# EAGLE board MyoWare_LED_Shield-Panel-v10 (EAGLE 7.5.0), part 1 of 2
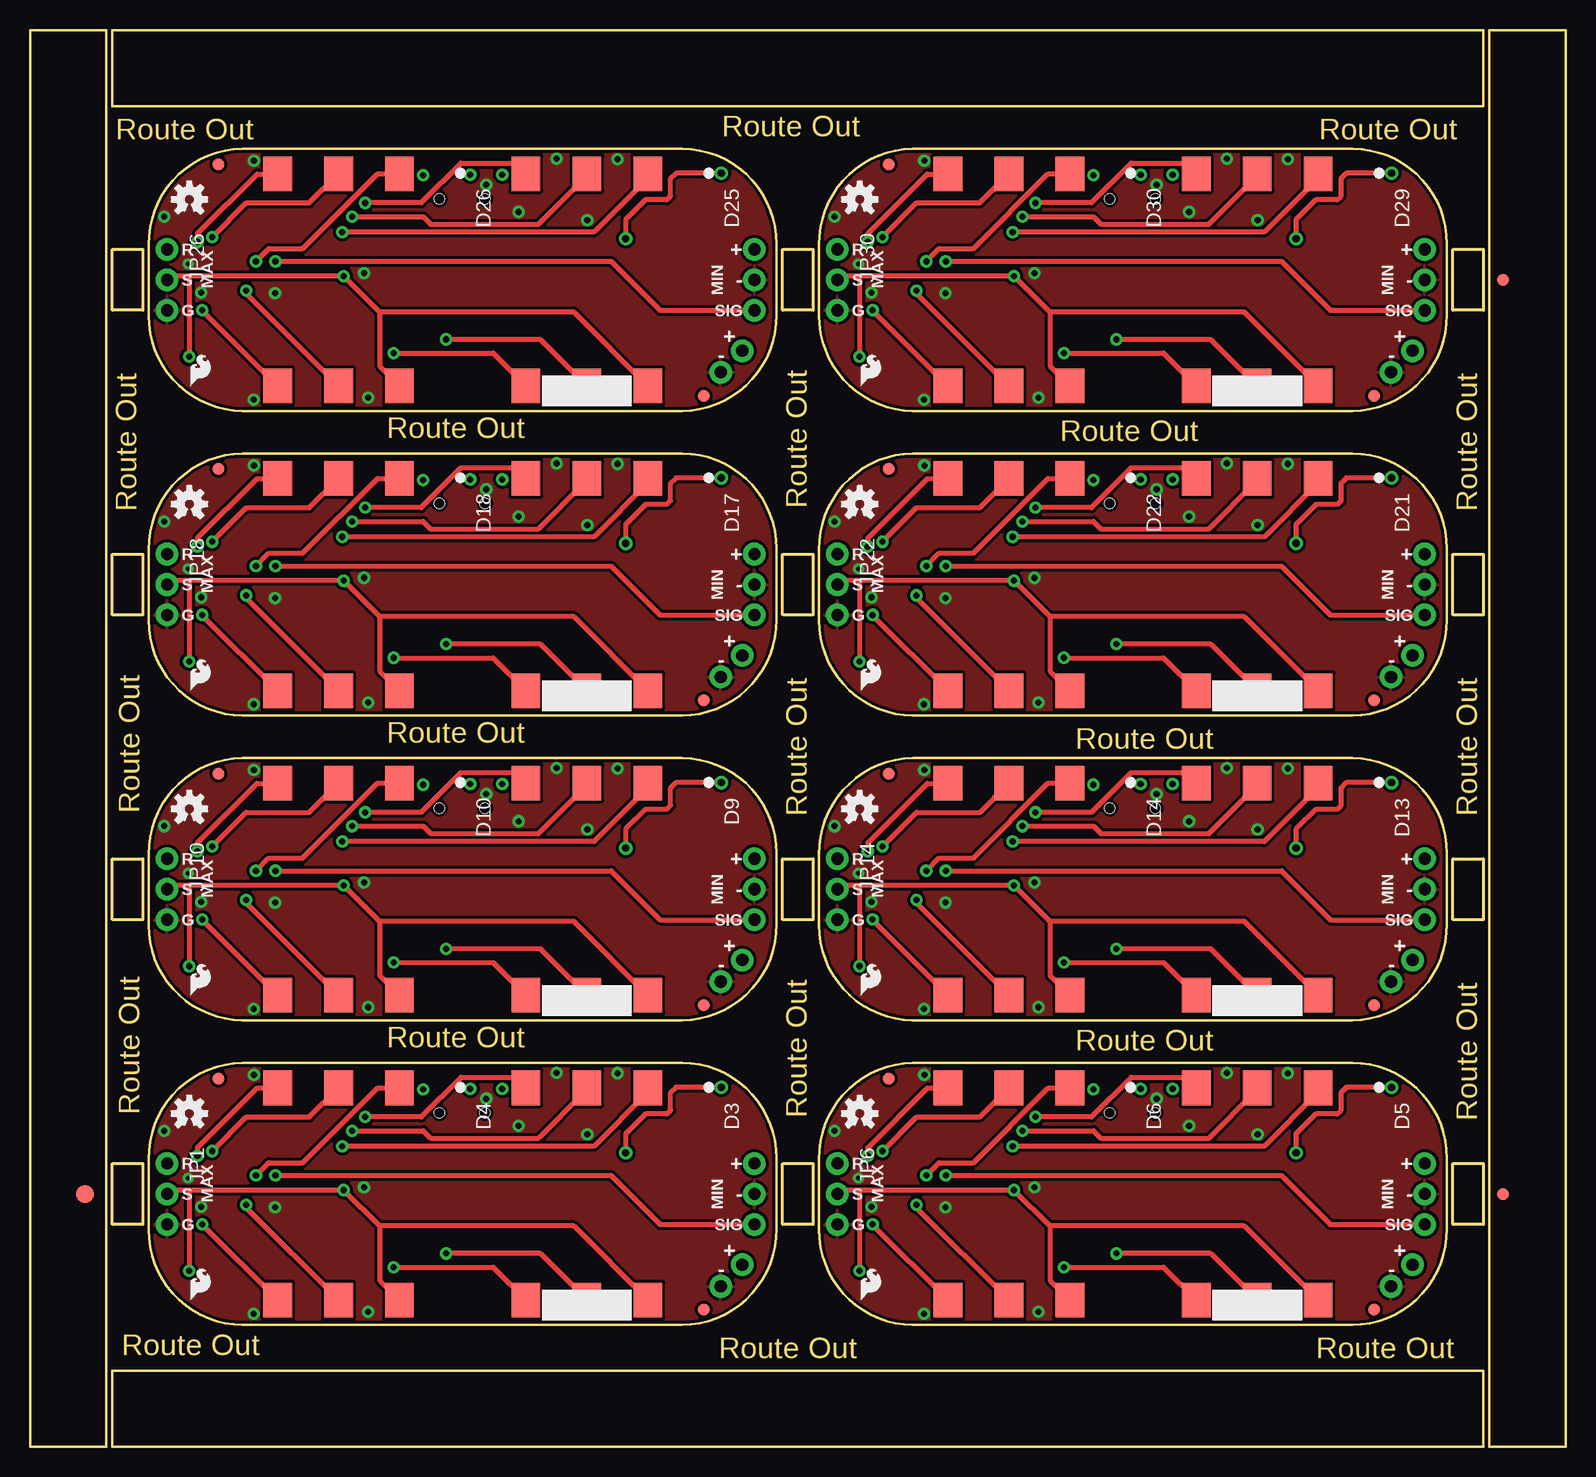
[diagram p0: board, top side]
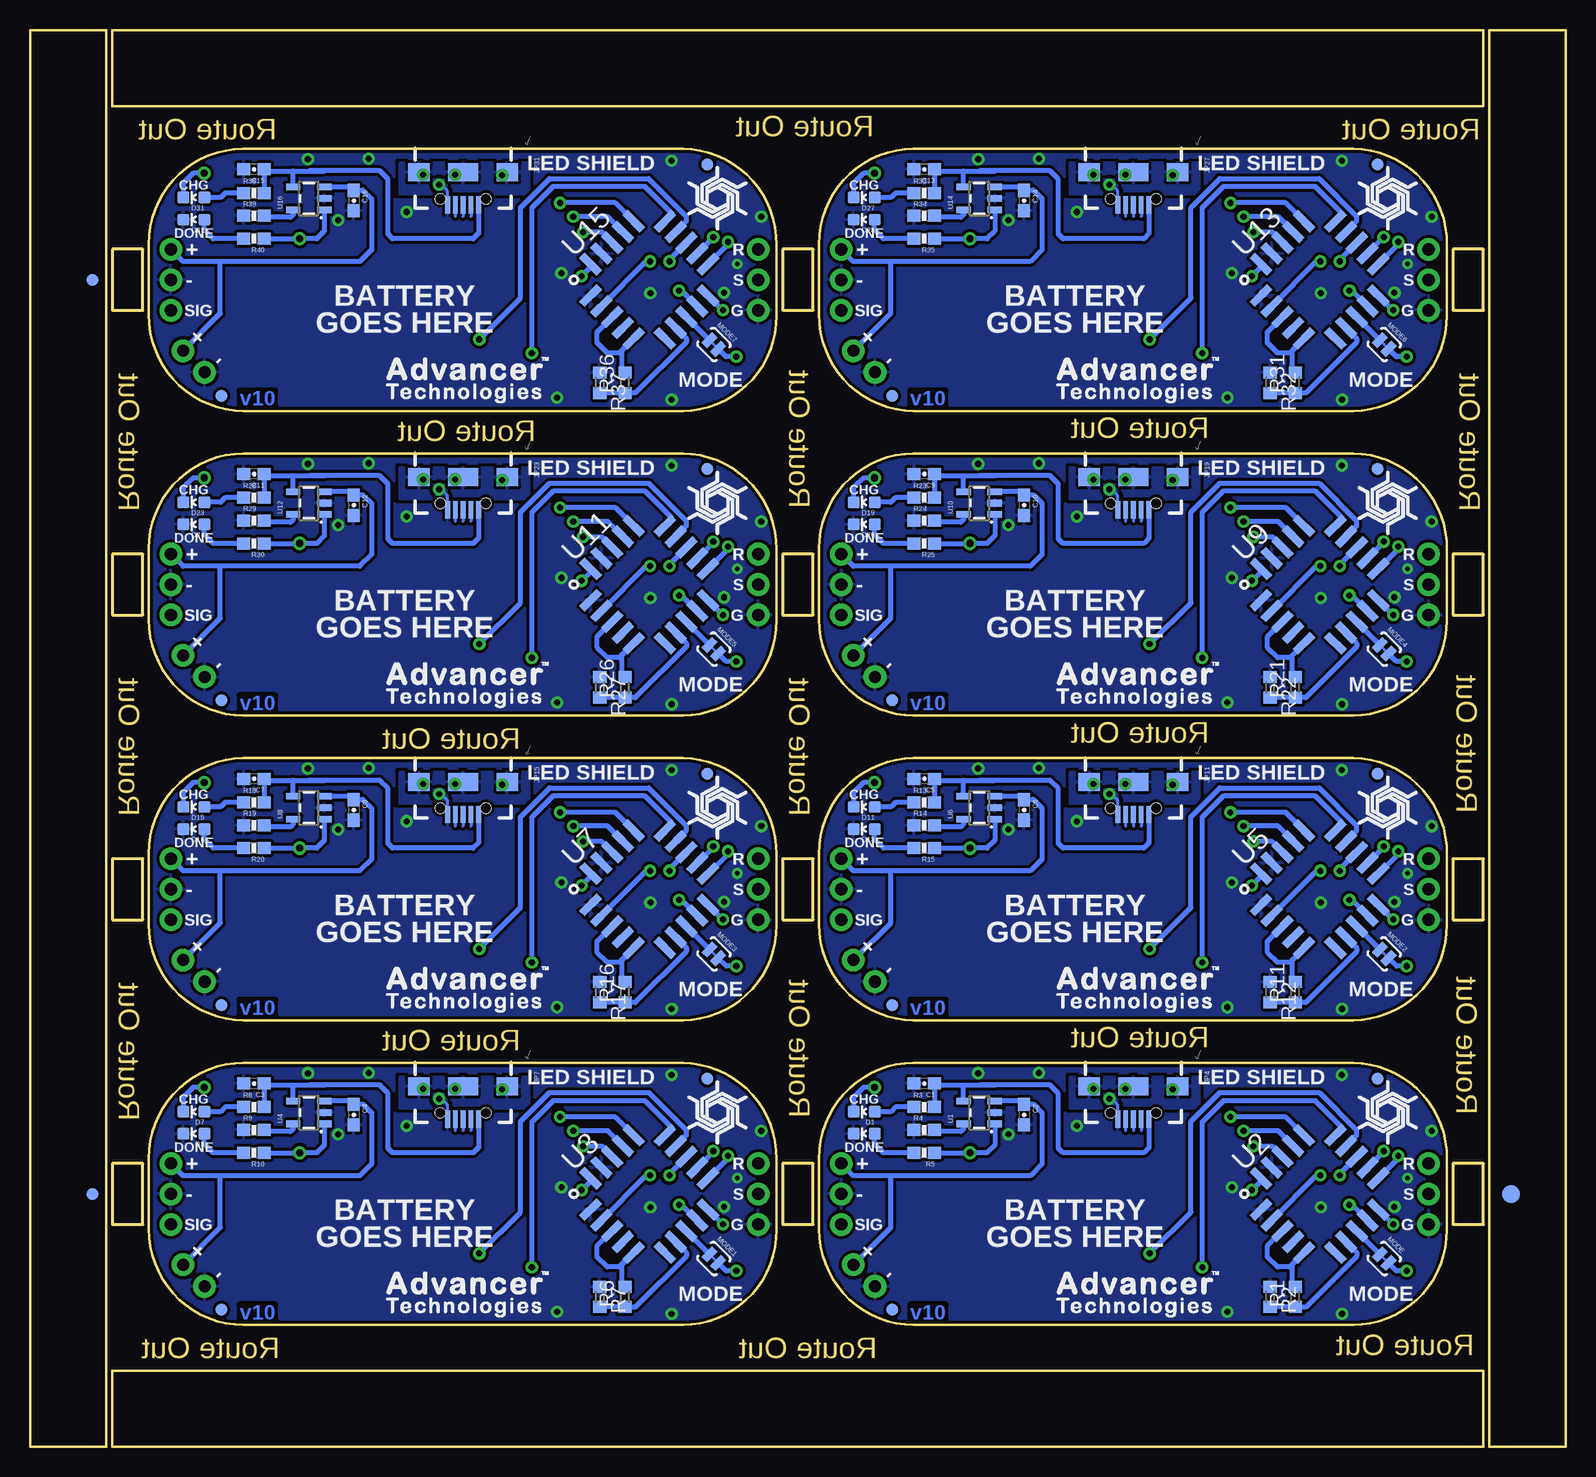
[diagram p1: board, bottom side, seen from below]

Size 128.02 x 118.11 mm. Coordinates in mm from the lower left corner, seen from the top.
Outline: 17.68,10.16 17.72,10.16
Outline: 17.72,10.16 54.36,10.16 arc90 62.23,18.16 62.23,24.07 arc90 54.36,32 17.72,32 arc90 9.91,24
Outline: 9.91,24 9.91,18.1 arc90 17.72,10.16
Outline: 9.91,24 9.91,24.07
Outline: 73.56,10.16 73.6,10.16
Outline: 73.6,10.16 110.24,10.16 arc90 118.11,18.16 118.11,24.07 arc90 110.24,32 73.6,32 arc90 65.79,24
Outline: 65.79,24 65.79,18.1 arc90 73.6,10.16
Outline: 65.79,24 65.79,24.07
Outline: 17.68,35.56 17.72,35.56
Outline: 17.72,35.56 54.36,35.56 arc90 62.23,43.56 62.23,49.47 arc90 54.36,57.4 17.72,57.4 arc90 9.91,49.4
Outline: 9.91,49.4 9.91,43.5 arc90 17.72,35.56
Outline: 9.91,49.4 9.91,49.47
Outline: 73.56,35.56 73.6,35.56
Outline: 73.6,35.56 110.24,35.56 arc90 118.11,43.56 118.11,49.47 arc90 110.24,57.4 73.6,57.4 arc90 65.79,49.4
Outline: 65.79,49.4 65.79,43.5 arc90 73.6,35.56
Outline: 65.79,49.4 65.79,49.47
Outline: 17.68,60.96 17.72,60.96
Outline: 17.72,60.96 54.36,60.96 arc90 62.23,68.96 62.23,74.87 arc90 54.36,82.8 17.72,82.8 arc90 9.91,74.8
Outline: 9.91,74.8 9.91,68.9 arc90 17.72,60.96
Outline: 9.91,74.8 9.91,74.87
Outline: 73.56,60.96 73.6,60.96
Outline: 73.6,60.96 110.24,60.96 arc90 118.11,68.96 118.11,74.87 arc90 110.24,82.8 73.6,82.8 arc90 65.79,74.8
Outline: 65.79,74.8 65.79,68.9 arc90 73.6,60.96
Outline: 65.79,74.8 65.79,74.87
Outline: 17.68,86.36 17.72,86.36
Outline: 17.72,86.36 54.36,86.36 arc90 62.23,94.36 62.23,100.27 arc90 54.36,108.2 17.72,108.2 arc90 9.91,100.2
Outline: 9.91,100.2 9.91,94.3 arc90 17.72,86.36
Outline: 9.91,100.2 9.91,100.27
Outline: 73.56,86.36 73.6,86.36
Outline: 73.6,86.36 110.24,86.36 arc90 118.11,94.36 118.11,100.27 arc90 110.24,108.2 73.6,108.2 arc90 65.79,100.2
Outline: 65.79,100.2 65.79,94.3 arc90 73.6,86.36
Outline: 65.79,100.2 65.79,100.27
Outline: 6.35,75.44 6.35,0 0,0 0,25.91
Outline: 0,23.37 0,118.11 6.35,118.11 6.35,72.9
Outline: 79.76,0 6.86,0 6.86,6.35 30.23,6.35
Outline: 27.69,6.35 121.16,6.35 121.16,0 77.22,0
Outline: 128.02,82.3 128.02,0 121.67,0 121.67,32.77
Outline: 121.67,30.23 121.67,118.11 128.02,118.11 128.02,79.76
Outline: 45.47,118.11 121.16,118.11 121.16,111.76 95,111.76
Outline: 97.54,111.76 6.86,111.76 6.86,118.11 48.01,118.11
Outline: 62.74,18.54 62.74,23.62 65.28,23.62 65.28,18.54 62.74,18.54
Outline: 118.62,18.54 118.62,23.62 121.16,23.62 121.16,18.54 118.62,18.54
Outline: 6.86,18.54 6.86,23.62 9.4,23.62 9.4,18.54 6.86,18.54
Outline: 62.74,43.94 62.74,49.02 65.28,49.02 65.28,43.94 62.74,43.94
Outline: 118.62,43.94 118.62,49.02 121.16,49.02 121.16,43.94 118.62,43.94
Outline: 6.86,43.94 6.86,49.02 9.4,49.02 9.4,43.94 6.86,43.94
Outline: 62.74,69.34 62.74,74.42 65.28,74.42 65.28,69.34 62.74,69.34
Outline: 118.62,69.34 118.62,74.42 121.16,74.42 121.16,69.34 118.62,69.34
Outline: 6.86,69.34 6.86,74.42 9.4,74.42 9.4,69.34 6.86,69.34
Outline: 62.74,94.74 62.74,99.82 65.28,99.82 65.28,94.74 62.74,94.74
Outline: 118.62,94.74 118.62,99.82 121.16,99.82 121.16,94.74 118.62,94.74
Outline: 6.86,94.74 6.86,99.82 9.4,99.82 9.4,94.74 6.86,94.74
Copper layers (1*16): Top 0.035mm / dielectric 1.5mm / Bottom 0.035mm
Design rules "SparkFun-2-layer-STANDARD": minimum track width 10mil, minimum drill 20mil, track to track 10mil, track to pad 8mil, pad to pad 8mil, via to via 10mil, smd to smd 8mil, copper to edge 8mil, drill to drill 8mil, minimum pad ring 10mil, minimum via ring 10mil, stop-mask expansion 4mil, vias tented up to drill 20mil, thermal gap 10mil

## Footprints (pad centres in the part's own frame; a part is rotated, then mirrored left to right if it is on the bottom)
0603-CAP = smd 1.1 x 1: 1 -0.85,0; 2 0.85,0
LED-0603 = smd 1 x 1: A 0,-0.877; C 0,0.877
LED_BAR_SMD = smd 2.4 x 2.88: 1 -5.08,-8.84; 2 0,-8.84; 3 5.08,-8.84; 4 5.08,8.84; 5 0,8.84; 6 -5.08,8.84
FIDUCIAL-1.5X3 = smd 1.5 x 1.5: 1 0,0
FIDUCIAL-1X2 = smd 1 x 1: 1 0,0
1X03_NO_SILK = drill 1.016 pad 1.88: 1 0,0; 2 2.54,0; 3 5.08,0
1X02_NO_SILK = drill 1.016 pad 1.88: 1 0,0; 2 2.54,0
USB-B-MICRO-SMD_V03 = smd 1.45 x 0.4: D+ 2.725,0; D- 2.725,0.65; GND 2.725,-1.3; ID 2.725,-0.65; VBUS 2.725,1.3 | smd 1.5 x 1.8: SHIELD1 0,3.685; SHIELD2 0,-3.685 | smd 1.5 x 2.5: SHIELD3 0,0 | hole 0.85: 2.2,1.9; 2.2,-1.9
PAD-JUMPER-2-NC_BY_TRACE_YES_SILK = smd 0.635 x 1.27: 1 -0.508,0; 2 0.508,0
R0603 = smd 1 x 1.1: 1 -0.85,0; 2 0.85,0
0603-RES = smd 1.1 x 1: 1 -0.85,0; 2 0.85,0
SOT23-5 = smd 0.55 x 1.2: 1 -0.95,-1.3; 2 0,-1.3; 3 0.95,-1.3; 4 0.95,1.3; 5 -0.95,1.3
PLCC20S = smd 0.63 x 2.035: 1 0,4.383; 2 -1.27,4.383; 3 -2.54,4.383; 9 -2.54,-4.383; 10 -1.27,-4.383; 11 0,-4.383; 12 1.27,-4.383; 13 2.54,-4.383; 19 2.54,4.383; 20 1.27,4.383 | smd 2.035 x 0.63: 4 -4.383,2.54; 5 -4.383,1.27; 6 -4.383,0; 7 -4.383,-1.27; 8 -4.383,-2.54; 14 4.383,-2.54; 15 4.383,-1.27; 16 4.383,0; 17 4.383,1.27; 18 4.383,2.54

## Placement (x,y rotation side)
C1  4.7uF  [0603-CAP]  53.47,30.29 180 bottom
C2  4.7uF  [0603-CAP]  45.15,27.69 270 bottom
C3  4.7uF  [0603-CAP]  109.35,30.29 180 bottom
C4  4.7uF  [0603-CAP]  101.03,27.69 270 bottom
C5  4.7uF  [0603-CAP]  53.47,55.69 180 bottom
C6  4.7uF  [0603-CAP]  45.15,53.09 270 bottom
C7  4.7uF  [0603-CAP]  109.35,55.69 180 bottom
C8  4.7uF  [0603-CAP]  101.03,53.09 270 bottom
C9  4.7uF  [0603-CAP]  53.47,81.09 180 bottom
C10  4.7uF  [0603-CAP]  45.15,78.49 270 bottom
C11  4.7uF  [0603-CAP]  109.35,81.09 180 bottom
C12  4.7uF  [0603-CAP]  101.03,78.49 270 bottom
C13  4.7uF  [0603-CAP]  53.47,106.49 180 bottom
C14  4.7uF  [0603-CAP]  45.15,103.89 270 bottom
C15  4.7uF  [0603-CAP]  109.35,106.49 180 bottom
C16  4.7uF  [0603-CAP]  101.03,103.89 270 bottom
D1  RED  [LED-0603]  58.48,27.94 90 bottom
D2  GREEN  [LED-0603]  58.48,26.1 90 bottom
D3  SMA-B500  [LED_BAR_SMD]  46.42,21.08 180 top
D4  SMA-B500  [LED_BAR_SMD]  25.72,21.08 180 top
D5  SMA-B500  [LED_BAR_SMD]  102.3,21.08 180 top
D6  SMA-B500  [LED_BAR_SMD]  81.6,21.08 180 top
D7  RED  [LED-0603]  114.36,27.94 90 bottom
D8  GREEN  [LED-0603]  114.36,26.1 90 bottom
D9  SMA-B500  [LED_BAR_SMD]  46.42,46.48 180 top
D10  SMA-B500  [LED_BAR_SMD]  25.72,46.48 180 top
D11  RED  [LED-0603]  58.48,53.34 90 bottom
D12  GREEN  [LED-0603]  58.48,51.5 90 bottom
D13  SMA-B500  [LED_BAR_SMD]  102.3,46.48 180 top
D14  SMA-B500  [LED_BAR_SMD]  81.6,46.48 180 top
D15  RED  [LED-0603]  114.36,53.34 90 bottom
D16  GREEN  [LED-0603]  114.36,51.5 90 bottom
D17  SMA-B500  [LED_BAR_SMD]  46.42,71.88 180 top
D18  SMA-B500  [LED_BAR_SMD]  25.72,71.88 180 top
D19  RED  [LED-0603]  58.48,78.74 90 bottom
D20  GREEN  [LED-0603]  58.48,76.9 90 bottom
D21  SMA-B500  [LED_BAR_SMD]  102.3,71.88 180 top
D22  SMA-B500  [LED_BAR_SMD]  81.6,71.88 180 top
D23  RED  [LED-0603]  114.36,78.74 90 bottom
D24  GREEN  [LED-0603]  114.36,76.9 90 bottom
D25  SMA-B500  [LED_BAR_SMD]  46.42,97.28 180 top
D26  SMA-B500  [LED_BAR_SMD]  25.72,97.28 180 top
D27  RED  [LED-0603]  58.48,104.14 90 bottom
D28  GREEN  [LED-0603]  58.48,102.3 90 bottom
D29  SMA-B500  [LED_BAR_SMD]  102.3,97.28 180 top
D30  SMA-B500  [LED_BAR_SMD]  81.6,97.28 180 top
D31  RED  [LED-0603]  114.36,104.14 90 bottom
D32  GREEN  [LED-0603]  114.36,102.3 90 bottom
E$1  [FIDUCIAL-1.5X3]  4.57,21.08 0 top
E$2  [FIDUCIAL-1X2]  122.81,97.28 180 bottom
E$3  [FIDUCIAL-1X2]  122.81,21.08 0 bottom
E$4  [FIDUCIAL-1.5X3]  4.57,21.08 0 bottom
E$5  [FIDUCIAL-1X2]  122.81,21.08 0 top
E$6  [FIDUCIAL-1X2]  122.81,97.28 180 top
FID1  FIDUCIAL1X2  [FIDUCIAL-1X2]  15.7,30.71 0 bottom
FID2  FIDUCIAL1X2  [FIDUCIAL-1X2]  56.16,11.43 0 bottom
FID3  FIDUCIAL1X2  [FIDUCIAL-1X2]  56.16,11.43 0 top
FID4  FIDUCIAL1X2  [FIDUCIAL-1X2]  15.7,30.71 0 top
FID5  FIDUCIAL1X2  [FIDUCIAL-1X2]  71.58,30.71 0 bottom
FID6  FIDUCIAL1X2  [FIDUCIAL-1X2]  112.04,11.43 0 bottom
FID7  FIDUCIAL1X2  [FIDUCIAL-1X2]  112.04,11.43 0 top
FID8  FIDUCIAL1X2  [FIDUCIAL-1X2]  71.58,30.71 0 top
FID9  FIDUCIAL1X2  [FIDUCIAL-1X2]  15.7,56.11 0 bottom
FID10  FIDUCIAL1X2  [FIDUCIAL-1X2]  56.16,36.83 0 bottom
FID11  FIDUCIAL1X2  [FIDUCIAL-1X2]  56.16,36.83 0 top
FID12  FIDUCIAL1X2  [FIDUCIAL-1X2]  15.7,56.11 0 top
FID13  FIDUCIAL1X2  [FIDUCIAL-1X2]  71.58,56.11 0 bottom
FID14  FIDUCIAL1X2  [FIDUCIAL-1X2]  112.04,36.83 0 bottom
FID15  FIDUCIAL1X2  [FIDUCIAL-1X2]  112.04,36.83 0 top
FID16  FIDUCIAL1X2  [FIDUCIAL-1X2]  71.58,56.11 0 top
FID17  FIDUCIAL1X2  [FIDUCIAL-1X2]  15.7,81.51 0 bottom
FID18  FIDUCIAL1X2  [FIDUCIAL-1X2]  56.16,62.23 0 bottom
FID19  FIDUCIAL1X2  [FIDUCIAL-1X2]  56.16,62.23 0 top
FID20  FIDUCIAL1X2  [FIDUCIAL-1X2]  15.7,81.51 0 top
FID21  FIDUCIAL1X2  [FIDUCIAL-1X2]  71.58,81.51 0 bottom
FID22  FIDUCIAL1X2  [FIDUCIAL-1X2]  112.04,62.23 0 bottom
FID23  FIDUCIAL1X2  [FIDUCIAL-1X2]  112.04,62.23 0 top
FID24  FIDUCIAL1X2  [FIDUCIAL-1X2]  71.58,81.51 0 top
FID25  FIDUCIAL1X2  [FIDUCIAL-1X2]  15.7,106.91 0 bottom
FID26  FIDUCIAL1X2  [FIDUCIAL-1X2]  56.16,87.63 0 bottom
FID27  FIDUCIAL1X2  [FIDUCIAL-1X2]  56.16,87.63 0 top
FID28  FIDUCIAL1X2  [FIDUCIAL-1X2]  15.7,106.91 0 top
FID29  FIDUCIAL1X2  [FIDUCIAL-1X2]  71.58,106.91 0 bottom
FID30  FIDUCIAL1X2  [FIDUCIAL-1X2]  112.04,87.63 0 bottom
FID31  FIDUCIAL1X2  [FIDUCIAL-1X2]  112.04,87.63 0 top
FID32  FIDUCIAL1X2  [FIDUCIAL-1X2]  71.58,106.91 0 top
JP1  Power  [1X03_NO_SILK]  11.43,23.62 270 top
JP2  Signal  [1X03_NO_SILK]  60.39,23.62 270 top
JP3  LiPo  [1X02_NO_SILK]  59.37,15.18 225 top
JP4  [USB-B-MICRO-SMD_V03]  36.03,30.04 270 bottom
JP5  Signal  [1X03_NO_SILK]  116.27,23.62 270 top
JP6  Power  [1X03_NO_SILK]  67.31,23.62 270 top
JP7  [USB-B-MICRO-SMD_V03]  91.91,30.04 270 bottom
JP8  LiPo  [1X02_NO_SILK]  115.25,15.18 225 top
JP9  Signal  [1X03_NO_SILK]  60.39,49.02 270 top
JP10  Power  [1X03_NO_SILK]  11.43,49.02 270 top
JP11  [USB-B-MICRO-SMD_V03]  36.03,55.44 270 bottom
JP12  LiPo  [1X02_NO_SILK]  59.37,40.58 225 top
JP13  Signal  [1X03_NO_SILK]  116.27,49.02 270 top
JP14  Power  [1X03_NO_SILK]  67.31,49.02 270 top
JP15  [USB-B-MICRO-SMD_V03]  91.91,55.44 270 bottom
JP16  LiPo  [1X02_NO_SILK]  115.25,40.58 225 top
JP17  Signal  [1X03_NO_SILK]  60.39,74.42 270 top
JP18  Power  [1X03_NO_SILK]  11.43,74.42 270 top
JP19  [USB-B-MICRO-SMD_V03]  36.03,80.84 270 bottom
JP20  LiPo  [1X02_NO_SILK]  59.37,65.98 225 top
JP21  Signal  [1X03_NO_SILK]  116.27,74.42 270 top
JP22  Power  [1X03_NO_SILK]  67.31,74.42 270 top
JP23  [USB-B-MICRO-SMD_V03]  91.91,80.84 270 bottom
JP24  LiPo  [1X02_NO_SILK]  115.25,65.98 225 top
JP25  Signal  [1X03_NO_SILK]  60.39,99.82 270 top
JP26  Power  [1X03_NO_SILK]  11.43,99.82 270 top
JP27  [USB-B-MICRO-SMD_V03]  36.03,106.24 270 bottom
JP28  LiPo  [1X02_NO_SILK]  59.37,91.38 225 top
JP29  Signal  [1X03_NO_SILK]  116.27,99.82 270 top
JP30  Power  [1X03_NO_SILK]  67.31,99.82 270 top
JP31  [USB-B-MICRO-SMD_V03]  91.91,106.24 270 bottom
JP32  LiPo  [1X02_NO_SILK]  115.25,91.38 225 top
LOGO1  SFE_LOGO_FLAME.1_INCH  [SFE_LOGO_FLAME_.1]  13.06,11.91 0 top
LOGO2  OSHW-LOGOS  [OSHW-LOGO-S]  13.28,27.79 0 top
LOGO3  SFE_LOGO_FLAME.1_INCH  [SFE_LOGO_FLAME_.1]  68.94,11.91 0 top
LOGO4  OSHW-LOGOS  [OSHW-LOGO-S]  69.16,27.79 0 top
LOGO5  SFE_LOGO_FLAME.1_INCH  [SFE_LOGO_FLAME_.1]  13.06,37.31 0 top
LOGO6  OSHW-LOGOS  [OSHW-LOGO-S]  13.28,53.19 0 top
LOGO7  SFE_LOGO_FLAME.1_INCH  [SFE_LOGO_FLAME_.1]  68.94,37.31 0 top
LOGO8  OSHW-LOGOS  [OSHW-LOGO-S]  69.16,53.19 0 top
LOGO9  SFE_LOGO_FLAME.1_INCH  [SFE_LOGO_FLAME_.1]  13.06,62.71 0 top
LOGO10  OSHW-LOGOS  [OSHW-LOGO-S]  13.28,78.59 0 top
LOGO11  SFE_LOGO_FLAME.1_INCH  [SFE_LOGO_FLAME_.1]  68.94,62.71 0 top
LOGO12  OSHW-LOGOS  [OSHW-LOGO-S]  69.16,78.59 0 top
LOGO13  SFE_LOGO_FLAME.1_INCH  [SFE_LOGO_FLAME_.1]  13.06,88.11 0 top
LOGO14  OSHW-LOGOS  [OSHW-LOGO-S]  13.28,103.99 0 top
LOGO15  SFE_LOGO_FLAME.1_INCH  [SFE_LOGO_FLAME_.1]  68.94,88.11 0 top
LOGO16  OSHW-LOGOS  [OSHW-LOGO-S]  69.16,103.99 0 top
MODE  JUMPER-PAD-2-NC_BY_TRACE  [PAD-JUMPER-2-NC_BY_TRACE_YES_SILK]  15.13,15.69 315 bottom
MODE1  JUMPER-PAD-2-NC_BY_TRACE  [PAD-JUMPER-2-NC_BY_TRACE_YES_SILK]  71.01,15.69 315 bottom
MODE2  JUMPER-PAD-2-NC_BY_TRACE  [PAD-JUMPER-2-NC_BY_TRACE_YES_SILK]  15.13,41.09 315 bottom
MODE3  JUMPER-PAD-2-NC_BY_TRACE  [PAD-JUMPER-2-NC_BY_TRACE_YES_SILK]  71.01,41.09 315 bottom
MODE4  JUMPER-PAD-2-NC_BY_TRACE  [PAD-JUMPER-2-NC_BY_TRACE_YES_SILK]  15.13,66.49 315 bottom
MODE5  JUMPER-PAD-2-NC_BY_TRACE  [PAD-JUMPER-2-NC_BY_TRACE_YES_SILK]  71.01,66.49 315 bottom
MODE6  JUMPER-PAD-2-NC_BY_TRACE  [PAD-JUMPER-2-NC_BY_TRACE_YES_SILK]  15.13,91.89 315 bottom
MODE7  JUMPER-PAD-2-NC_BY_TRACE  [PAD-JUMPER-2-NC_BY_TRACE_YES_SILK]  71.01,91.89 315 bottom
R1  6.49k  [R0603]  22.54,12.51 90 bottom
R2  7.5k  [R0603]  24.64,12.51 270 bottom
R3  330  [0603-RES]  53.47,28.32 0 bottom
R4  10K  [0603-RES]  53.47,26.42 0 bottom
R5  330  [0603-RES]  53.47,24.51 180 bottom
R6  6.49k  [R0603]  78.42,12.51 90 bottom
R7  7.5k  [R0603]  80.52,12.51 270 bottom
R8  330  [0603-RES]  109.35,28.32 0 bottom
R9  10K  [0603-RES]  109.35,26.42 0 bottom
R10  330  [0603-RES]  109.35,24.51 180 bottom
R11  6.49k  [R0603]  22.54,37.91 90 bottom
R12  7.5k  [R0603]  24.64,37.91 270 bottom
R13  330  [0603-RES]  53.47,53.72 0 bottom
R14  10K  [0603-RES]  53.47,51.82 0 bottom
R15  330  [0603-RES]  53.47,49.91 180 bottom
R16  6.49k  [R0603]  78.42,37.91 90 bottom
R17  7.5k  [R0603]  80.52,37.91 270 bottom
R18  330  [0603-RES]  109.35,53.72 0 bottom
R19  10K  [0603-RES]  109.35,51.82 0 bottom
R20  330  [0603-RES]  109.35,49.91 180 bottom
R21  6.49k  [R0603]  22.54,63.31 90 bottom
R22  7.5k  [R0603]  24.64,63.31 270 bottom
R23  330  [0603-RES]  53.47,79.12 0 bottom
R24  10K  [0603-RES]  53.47,77.22 0 bottom
R25  330  [0603-RES]  53.47,75.31 180 bottom
R26  6.49k  [R0603]  78.42,63.31 90 bottom
R27  7.5k  [R0603]  80.52,63.31 270 bottom
R28  330  [0603-RES]  109.35,79.12 0 bottom
R29  10K  [0603-RES]  109.35,77.22 0 bottom
R30  330  [0603-RES]  109.35,75.31 180 bottom
R31  6.49k  [R0603]  22.54,88.71 90 bottom
R32  7.5k  [R0603]  24.64,88.71 270 bottom
R33  330  [0603-RES]  53.47,104.52 0 bottom
R34  10K  [0603-RES]  53.47,102.62 0 bottom
R35  330  [0603-RES]  53.47,100.71 180 bottom
R36  6.49k  [R0603]  78.42,88.71 90 bottom
R37  7.5k  [R0603]  80.52,88.71 270 bottom
R38  330  [0603-RES]  109.35,104.52 0 bottom
R39  10K  [0603-RES]  109.35,102.62 0 bottom
R40  330  [0603-RES]  109.35,100.71 180 bottom
U1  MCP73831  [SOT23-5]  48.9,27.88 90 bottom
U2  LM3914V  [PLCC20S]  20.51,21.08 45 bottom
U3  LM3914V  [PLCC20S]  76.39,21.08 45 bottom
U4  MCP73831  [SOT23-5]  104.78,27.88 90 bottom
U5  LM3914V  [PLCC20S]  20.51,46.48 45 bottom
U6  MCP73831  [SOT23-5]  48.9,53.28 90 bottom
U7  LM3914V  [PLCC20S]  76.39,46.48 45 bottom
U8  MCP73831  [SOT23-5]  104.78,53.28 90 bottom
U9  LM3914V  [PLCC20S]  20.51,71.88 45 bottom
U10  MCP73831  [SOT23-5]  48.9,78.68 90 bottom
U11  LM3914V  [PLCC20S]  76.39,71.88 45 bottom
U12  MCP73831  [SOT23-5]  104.78,78.68 90 bottom
U13  LM3914V  [PLCC20S]  20.51,97.28 45 bottom
U14  MCP73831  [SOT23-5]  48.9,104.08 90 bottom
U15  LM3914V  [PLCC20S]  76.39,97.28 45 bottom
U16  MCP73831  [SOT23-5]  104.78,104.08 90 bottom
U$1  [SPIRAL_LOGO_60%]  70.68,27.88 0 bottom
U$2  [ADVANCER_LOGO]  91.91,12.51 0 bottom
U$3  [SPIRAL_LOGO_60%]  14.8,53.28 0 bottom
U$4  [ADVANCER_LOGO]  36.03,37.91 0 bottom
U$5  [SPIRAL_LOGO_60%]  70.68,53.28 0 bottom
U$6  [ADVANCER_LOGO]  36.03,12.51 0 bottom
U$7  [ADVANCER_LOGO]  91.91,37.91 0 bottom
U$8  [SPIRAL_LOGO_60%]  14.8,78.68 0 bottom
U$9  [SPIRAL_LOGO_60%]  14.8,27.88 0 bottom
U$10  [ADVANCER_LOGO]  36.03,63.31 0 bottom
U$11  [SPIRAL_LOGO_60%]  70.68,78.68 0 bottom
U$12  [ADVANCER_LOGO]  91.91,63.31 0 bottom
U$13  [SPIRAL_LOGO_60%]  14.8,104.08 0 bottom
U$14  [ADVANCER_LOGO]  36.03,88.71 0 bottom
U$15  [SPIRAL_LOGO_60%]  70.68,104.08 0 bottom
U$16  [ADVANCER_LOGO]  91.91,88.71 0 bottom

## Library data of the parts
C1-C16 = SparkFun-Capacitors; PROD_ID: CAP-08280
D1 D7 D11 D15 D19 D23 D27 D31 = SparkFun-LED; PROD_ID: DIO-00819
D2 D8 D12 D16 D20 D24 D28 D32 = SparkFun-LED; PROD_ID: DIO-00821
D3-D6 D9 D10 D13 D14 D17 D18 D21 D22 D25 D26 D29 D30 = Testing; PROD_ID: DIO-13127
E$1 E$4 = SparkFun-Retired
E$2 E$3 E$5 E$6 FID1-FID32 LOGO1-LOGO16 = SparkFun-Aesthetics
JP1-JP3 JP5 JP6 JP8-JP10 JP12-JP14 JP16-JP18 JP20-JP22 JP24-JP26 JP28-JP30 JP32 = SparkFun-Connectors
JP4 JP7 JP11 JP15 JP19 JP23 JP27 JP31 = SparkFun-Connectors; PROD_ID: CONN-11752
MODE MODE1-MODE7 = SparkFun-Passives
R1 R6 R11 R16 R21 R26 R31 R36 = resistor; PROD_ID: RES-13202
R2 R7 R12 R17 R22 R27 R32 R37 = resistor; PROD_ID: RES-13203
R3 R5 R8 R10 R13 R15 R18 R20 R23 R25 R28 R30 R33 R35 R38 R40 = SparkFun-Resistors; PROD_ID: RES-00818
R4 R9 R14 R19 R24 R29 R34 R39 = SparkFun-Resistors; PROD_ID: RES-00824
U1 U4 U6 U8 U10 U12 U14 U16 = SparkFun-PowerIC; PROD_ID: IC-09995
U2 U3 U5 U7 U9 U11 U13 U15 = Testing; PROD_ID: IC-13110
U$1-U$16 = advancer-technologies

## Nets
+VS: C2.1 JP2.1 JP3.1 U1.3
+VS1: C4.1 JP5.1 JP8.1 U4.3
+VS2: C6.1 JP9.1 JP12.1 U6.3
+VS3: C8.1 JP13.1 JP16.1 U8.3
+VS4: C10.1 JP17.1 JP20.1 U10.3
+VS5: C12.1 JP21.1 JP24.1 U12.3
+VS6: C14.1 JP25.1 JP28.1 U14.3
+VS7: C16.1 JP29.1 JP32.1 U16.3
D+: JP4.D+
D+1: JP7.D+
D+2: JP11.D+
D+3: JP15.D+
D+4: JP19.D+
D+5: JP23.D+
D+6: JP27.D+
D+7: JP31.D+
D-: JP4.D-
D-1: JP7.D-
D-2: JP11.D-
D-3: JP15.D-
D-4: JP19.D-
D-5: JP23.D-
D-6: JP27.D-
D-7: JP31.D-
GND: C1.2 C2.2 D2.C JP1.3 JP2.2 JP3.2 JP4.GND R2.1 R4.1 U1.2 U2.2 U2.4
GND1: C3.2 C4.2 D8.C JP5.2 JP6.3 JP7.GND JP8.2 R7.1 R9.1 U3.2 U3.4 U4.2
GND2: C5.2 C6.2 D12.C JP9.2 JP10.3 JP11.GND JP12.2 R12.1 R14.1 U5.2 U5.4 U6.2
GND3: C7.2 C8.2 D16.C JP13.2 JP14.3 JP15.GND JP16.2 R17.1 R19.1 U7.2 U7.4 U8.2
GND4: C9.2 C10.2 D20.C JP17.2 JP18.3 JP19.GND JP20.2 R22.1 R24.1 U9.2 U9.4 U10.2
GND5: C11.2 C12.2 D24.C JP21.2 JP22.3 JP23.GND JP24.2 R27.1 R29.1 U11.2 U11.4 U12.2
GND6: C13.2 C14.2 D28.C JP25.2 JP26.3 JP27.GND JP28.2 R32.1 R34.1 U13.2 U13.4 U14.2
GND7: C15.2 C16.2 D32.C JP29.2 JP30.3 JP31.GND JP32.2 R37.1 R39.1 U15.2 U15.4 U16.2
ID: JP4.ID
ID1: JP7.ID
ID2: JP11.ID
ID3: JP15.ID
ID4: JP19.ID
ID5: JP23.ID
ID6: JP27.ID
ID7: JP31.ID
N$1: D3.1 U2.1
N$2: D3.2 U2.20
N$3: D3.5 U2.17
N$4: D3.3 U2.19
N$5: D4.1 U2.16
N$6: MODE.1 U2.11
N$7: D5.1 U3.1
N$8: D3.4 U2.18
N$9: D2.A R5.2
N$10: D1.A R3.1
N$11: D4.2 U2.15
N$12: D4.3 U2.14
N$13: D4.4 U2.13
N$14: D4.5 U2.12
N$15: D1.C R5.1 U1.1
N$16: D5.2 U3.20
N$17: R4.2 U1.5
N$18: D5.3 U3.19
N$19: R1.1 R2.2 U2.10
N$20: R1.2 U2.6 U2.8
N$21: D5.4 U3.18
N$22: D6.2 U3.15
N$23: D6.3 U3.14
N$24: D6.4 U3.13
N$25: D6.5 U3.12
N$26: R6.1 R7.2 U3.10
N$27: R6.2 U3.6 U3.8
N$28: D5.5 U3.17
N$29: D6.1 U3.16
N$30: MODE1.1 U3.11
N$31: D7.A R8.1
N$32: D7.C R10.1 U4.1
N$33: R9.2 U4.5
N$34: D8.A R10.2
N$35: D9.1 U5.1
N$36: D9.2 U5.20
N$37: D9.3 U5.19
N$38: D9.4 U5.18
N$39: D10.2 U5.15
N$40: D10.3 U5.14
N$41: D10.4 U5.13
N$42: D10.5 U5.12
N$43: R11.1 R12.2 U5.10
N$44: R11.2 U5.6 U5.8
N$45: D9.5 U5.17
N$46: D10.1 U5.16
N$47: MODE2.1 U5.11
N$48: D11.A R13.1
N$49: D11.C R15.1 U6.1
N$50: R14.2 U6.5
N$51: D12.A R15.2
N$52: D13.1 U7.1
N$53: D13.2 U7.20
N$54: D13.3 U7.19
N$55: D13.4 U7.18
N$56: D14.2 U7.15
N$57: D14.3 U7.14
N$58: D14.4 U7.13
N$59: D14.5 U7.12
N$60: R16.1 R17.2 U7.10
N$61: R16.2 U7.6 U7.8
N$62: D13.5 U7.17
N$63: D14.1 U7.16
N$64: MODE3.1 U7.11
N$65: D15.A R18.1
N$66: D15.C R20.1 U8.1
N$67: R19.2 U8.5
N$68: D16.A R20.2
N$69: D17.1 U9.1
N$70: D17.2 U9.20
N$71: D17.3 U9.19
N$72: D17.4 U9.18
N$73: D18.2 U9.15
N$74: D18.3 U9.14
N$75: D18.4 U9.13
N$76: D18.5 U9.12
N$77: R21.1 R22.2 U9.10
N$78: R21.2 U9.6 U9.8
N$79: D17.5 U9.17
N$80: D18.1 U9.16
N$81: MODE4.1 U9.11
N$82: D19.A R23.1
N$83: D19.C R25.1 U10.1
N$84: R24.2 U10.5
N$85: D20.A R25.2
N$86: D21.1 U11.1
N$87: D21.2 U11.20
N$88: D21.3 U11.19
N$89: D21.4 U11.18
N$90: D22.2 U11.15
N$91: D22.3 U11.14
N$92: D22.4 U11.13
N$93: D22.5 U11.12
N$94: R26.1 R27.2 U11.10
N$95: R26.2 U11.6 U11.8
N$96: D21.5 U11.17
N$97: D22.1 U11.16
N$98: MODE5.1 U11.11
N$99: D23.A R28.1
N$100: D23.C R30.1 U12.1
N$101: R29.2 U12.5
N$102: D24.A R30.2
N$103: D25.1 U13.1
N$104: D25.2 U13.20
N$105: D25.3 U13.19
N$106: D25.4 U13.18
N$107: D26.2 U13.15
N$108: D26.3 U13.14
N$109: D26.4 U13.13
N$110: D26.5 U13.12
N$111: R31.1 R32.2 U13.10
N$112: R31.2 U13.6 U13.8
N$113: D25.5 U13.17
N$114: D26.1 U13.16
N$115: MODE6.1 U13.11
N$116: D27.A R33.1
N$117: D27.C R35.1 U14.1
N$118: R34.2 U14.5
N$119: D28.A R35.2
N$120: D29.1 U15.1
N$121: D29.2 U15.20
N$122: D29.3 U15.19
N$123: D29.4 U15.18
N$124: D30.2 U15.15
N$125: D30.3 U15.14
N$126: D30.4 U15.13
N$127: D30.5 U15.12
N$128: R36.1 R37.2 U15.10
N$129: R36.2 U15.6 U15.8
N$130: D29.5 U15.17
N$131: D30.1 U15.16
N$132: MODE7.1 U15.11
N$133: D31.A R38.1
N$134: D31.C R40.1 U16.1
N$135: R39.2 U16.5
N$136: D32.A R40.2
RAW: JP1.1
RAW1: JP6.1
RAW2: JP10.1
RAW3: JP14.1
RAW4: JP18.1
RAW5: JP22.1
RAW6: JP26.1
RAW7: JP30.1
SHIELD: JP4.SHIELD1 JP4.SHIELD2 JP4.SHIELD3
SHIELD1: JP7.SHIELD1 JP7.SHIELD2 JP7.SHIELD3
SHIELD2: JP11.SHIELD1 JP11.SHIELD2 JP11.SHIELD3
SHIELD3: JP15.SHIELD1 JP15.SHIELD2 JP15.SHIELD3
SHIELD4: JP19.SHIELD1 JP19.SHIELD2 JP19.SHIELD3
SHIELD5: JP23.SHIELD1 JP23.SHIELD2 JP23.SHIELD3
SHIELD6: JP27.SHIELD1 JP27.SHIELD2 JP27.SHIELD3
SHIELD7: JP31.SHIELD1 JP31.SHIELD2 JP31.SHIELD3
SHLD_PWR: D3.6 D4.6 JP1.2 MODE.2 U2.3
SHLD_PWR1: D5.6 D6.6 JP6.2 MODE1.2 U3.3
SHLD_PWR2: D9.6 D10.6 JP10.2 MODE2.2 U5.3
SHLD_PWR3: D13.6 D14.6 JP14.2 MODE3.2 U7.3
SHLD_PWR4: D17.6 D18.6 JP18.2 MODE4.2 U9.3
SHLD_PWR5: D21.6 D22.6 JP22.2 MODE5.2 U11.3
SHLD_PWR6: D25.6 D26.6 JP26.2 MODE6.2 U13.3
SHLD_PWR7: D29.6 D30.6 JP30.2 MODE7.2 U15.3
SIG: JP2.3 U2.5
SIG1: JP5.3 U3.5
SIG2: JP9.3 U5.5
SIG3: JP13.3 U7.5
SIG4: JP17.3 U9.5
SIG5: JP21.3 U11.5
SIG6: JP25.3 U13.5
SIG7: JP29.3 U15.5
VBUS: C1.1 JP4.VBUS R3.2 U1.4
VBUS1: C3.1 JP7.VBUS R8.2 U4.4
VBUS2: C5.1 JP11.VBUS R13.2 U6.4
VBUS3: C7.1 JP15.VBUS R18.2 U8.4
VBUS4: C9.1 JP19.VBUS R23.2 U10.4
VBUS5: C11.1 JP23.VBUS R28.2 U12.4
VBUS6: C13.1 JP27.VBUS R33.2 U14.4
VBUS7: C15.1 JP31.VBUS R38.2 U16.4

## Tracks (layer width: path | path; a pad name or v marks a point on that pad's centre or on a via)
+VS
  Bottom 0.406: 45.15,28.57 45.15,28.83 U1.3 | 45.15,28.57 C2.1 | 56.26,22.61 44.64,22.61 43.62,23.62 43.62,27.81 44.39,28.57 45.15,28.57 | JP3.1 56.26,18.29 56.26,22.61 | 56.26,22.61 59.37,22.61 JP2.1
+VS1
  Bottom 0.406: 101.03,28.57 101.03,28.83 U4.3 | 101.03,28.57 C4.1 | 112.14,22.61 100.52,22.61 99.5,23.62 99.5,27.81 100.27,28.57 101.03,28.57 | JP8.1 112.14,18.29 112.14,22.61 | 112.14,22.61 115.25,22.61 JP5.1
+VS2
  Bottom 0.406: 45.15,53.98 45.15,54.23 U6.3 | 45.15,53.98 C6.1 | 56.26,48.01 44.64,48.01 43.62,49.02 43.62,53.21 44.39,53.98 45.15,53.98 | JP12.1 56.26,43.69 56.26,48.01 | 56.26,48.01 59.37,48.01 JP9.1
+VS3
  Bottom 0.406: 101.03,53.98 101.03,54.23 U8.3 | 101.03,53.98 C8.1 | 112.14,48.01 100.52,48.01 99.5,49.02 99.5,53.21 100.27,53.98 101.03,53.98 | JP16.1 112.14,43.69 112.14,48.01 | 112.14,48.01 115.25,48.01 JP13.1
+VS4
  Bottom 0.406: 45.15,79.38 45.15,79.63 U10.3 | 45.15,79.38 C10.1 | 56.26,73.41 44.64,73.41 43.62,74.42 43.62,78.61 44.39,79.38 45.15,79.38 | JP20.1 56.26,69.09 56.26,73.41 | 56.26,73.41 59.37,73.41 JP17.1
+VS5
  Bottom 0.406: 101.03,79.38 101.03,79.63 U12.3 | 101.03,79.38 C12.1 | 112.14,73.41 100.52,73.41 99.5,74.42 99.5,78.61 100.27,79.38 101.03,79.38 | JP24.1 112.14,69.09 112.14,73.41 | 112.14,73.41 115.25,73.41 JP21.1
+VS6
  Bottom 0.406: 45.15,104.78 45.15,105.03 U14.3 | 45.15,104.78 C14.1 | 56.26,98.81 44.64,98.81 43.62,99.82 43.62,104.01 44.39,104.78 45.15,104.78 | JP28.1 56.26,94.49 56.26,98.81 | 56.26,98.81 59.37,98.81 JP25.1
+VS7
  Bottom 0.406: 101.03,104.78 101.03,105.03 U16.3 | 101.03,104.78 C16.1 | 112.14,98.81 100.52,98.81 99.5,99.82 99.5,104.01 100.27,104.78 101.03,104.78 | JP32.1 112.14,94.49 112.14,98.81 | 112.14,98.81 115.25,98.81 JP29.1
D+
  Bottom 0.254: JP4.D+ 36.03,26.35
D+1
  Bottom 0.254: JP7.D+ 91.91,26.35
D+2
  Bottom 0.254: JP11.D+ 36.03,51.75
D+3
  Bottom 0.254: JP15.D+ 91.91,51.75
D+4
  Bottom 0.254: JP19.D+ 36.03,77.15
D+5
  Bottom 0.254: JP23.D+ 91.91,77.15
D+6
  Bottom 0.254: JP27.D+ 36.03,102.55
D+7
  Bottom 0.254: JP31.D+ 91.91,102.55
D-
  Bottom 0.254: JP4.D- 35.38,26.35
D-1
  Bottom 0.254: JP7.D- 91.26,26.35
D-2
  Bottom 0.254: JP11.D- 35.38,51.75
D-3
  Bottom 0.254: JP15.D- 91.26,51.75
D-4
  Bottom 0.254: JP19.D- 35.38,77.15
D-5
  Bottom 0.254: JP23.D- 91.26,77.15
D-6
  Bottom 0.254: JP27.D- 35.38,102.55
D-7
  Bottom 0.254: JP31.D- 91.26,102.55
GND  (via drill 0.38, 0.51)
  Bottom 0.254: 37.66,28.83 37.34,28.51 37.34,27.61 37.33,27.61 JP4.GND
  other vias: 11.18,26.34 40.74,26.75 28.19,11.25 20.42,19.96 14.27,20.02 13.18,22.4 18.64,11.1 27.84,21.64 18.67,31.01 43.9,31.18 48.97,31.14 46.46,26.05 38.04,29.02
  pour Bottom (isolate 0.254, rank 3): 9.91,10.16 62.23,10.16 62.23,32 9.91,32
  pour Top (isolate 0.254): 9.91,32 62.23,32 62.23,10.16 9.91,10.16
GND1  (via drill 0.38, 0.51)
  Bottom 0.254: 93.53,28.83 93.22,28.51 93.22,27.61 93.21,27.61 JP7.GND
  other vias: 67.06,26.34 96.62,26.75 84.07,11.25 76.3,19.96 70.15,20.02 69.06,22.4 74.52,11.1 83.72,21.64 74.55,31.01 99.78,31.18 104.85,31.14 102.34,26.05 93.92,29.02
  pour Bottom (isolate 0.254, rank 3): 65.79,10.16 118.11,10.16 118.11,32 65.79,32
  pour Top (isolate 0.254): 65.79,32 118.11,32 118.11,10.16 65.79,10.16
GND2  (via drill 0.38, 0.51)
  Bottom 0.254: 37.66,54.23 37.34,53.91 37.34,53.01 37.33,53.01 JP11.GND
  other vias: 11.18,51.74 40.74,52.15 28.19,36.65 20.42,45.36 14.27,45.42 13.18,47.8 18.64,36.5 27.84,47.04 18.67,56.41 43.9,56.58 48.97,56.54 46.46,51.45 38.04,54.42
  pour Bottom (isolate 0.254, rank 3): 9.91,35.56 62.23,35.56 62.23,57.4 9.91,57.4
  pour Top (isolate 0.254): 9.91,57.4 62.23,57.4 62.23,35.56 9.91,35.56
GND3  (via drill 0.38, 0.51)
  Bottom 0.254: 93.53,54.23 93.22,53.91 93.22,53.01 93.21,53.01 JP15.GND
  other vias: 67.06,51.74 96.62,52.15 84.07,36.65 76.3,45.36 70.15,45.42 69.06,47.8 74.52,36.5 83.72,47.04 74.55,56.41 99.78,56.58 104.85,56.54 102.34,51.45 93.92,54.42
  pour Bottom (isolate 0.254, rank 3): 65.79,35.56 118.11,35.56 118.11,57.4 65.79,57.4
  pour Top (isolate 0.254): 65.79,57.4 118.11,57.4 118.11,35.56 65.79,35.56
GND4  (via drill 0.38, 0.51)
  Bottom 0.254: 37.66,79.63 37.34,79.31 37.34,78.41 37.33,78.41 JP19.GND
  other vias: 11.18,77.14 40.74,77.55 28.19,62.05 20.42,70.76 14.27,70.82 13.18,73.2 18.64,61.9 27.84,72.44 18.67,81.81 43.9,81.98 48.97,81.94 46.46,76.85 38.04,79.82
  pour Bottom (isolate 0.254, rank 3): 9.91,60.96 62.23,60.96 62.23,82.8 9.91,82.8
  pour Top (isolate 0.254): 9.91,82.8 62.23,82.8 62.23,60.96 9.91,60.96
GND5  (via drill 0.38, 0.51)
  Bottom 0.254: 93.53,79.63 93.22,79.31 93.22,78.41 93.21,78.41 JP23.GND
  other vias: 67.06,77.14 96.62,77.55 84.07,62.05 76.3,70.76 70.15,70.82 69.06,73.2 74.52,61.9 83.72,72.44 74.55,81.81 99.78,81.98 104.85,81.94 102.34,76.85 93.92,79.82
  pour Bottom (isolate 0.254, rank 3): 65.79,60.96 118.11,60.96 118.11,82.8 65.79,82.8
  pour Top (isolate 0.254): 65.79,82.8 118.11,82.8 118.11,60.96 65.79,60.96
GND6  (via drill 0.38, 0.51)
  Bottom 0.254: 37.66,105.03 37.34,104.71 37.34,103.81 37.33,103.81 JP27.GND
  other vias: 11.18,102.54 40.74,102.95 28.19,87.45 20.42,96.16 14.27,96.22 13.18,98.6 18.64,87.3 27.84,97.84 18.67,107.21 43.9,107.38 48.97,107.34 46.46,102.25 38.04,105.22
  pour Bottom (isolate 0.254, rank 3): 9.91,86.36 62.23,86.36 62.23,108.2 9.91,108.2
  pour Top (isolate 0.254): 9.91,108.2 62.23,108.2 62.23,86.36 9.91,86.36
GND7  (via drill 0.38, 0.51)
  Bottom 0.254: 93.53,105.03 93.22,104.71 93.22,103.81 93.21,103.81 JP31.GND
  other vias: 67.06,102.54 96.62,102.95 84.07,87.45 76.3,96.16 70.15,96.22 69.06,98.6 74.52,87.3 83.72,97.84 74.55,107.21 99.78,107.38 104.85,107.34 102.34,102.25 93.92,105.22
  pour Bottom (isolate 0.254, rank 3): 65.79,86.36 118.11,86.36 118.11,108.2 65.79,108.2
  pour Top (isolate 0.254): 65.79,108.2 118.11,108.2 118.11,86.36 65.79,86.36
ID
  Bottom 0.254: JP4.ID 36.68,26.35
ID1
  Bottom 0.254: JP7.ID 92.56,26.35
ID2
  Bottom 0.254: JP11.ID 36.68,51.75
ID3
  Bottom 0.254: JP15.ID 92.56,51.75
ID4
  Bottom 0.254: JP19.ID 36.68,77.15
ID5
  Bottom 0.254: JP23.ID 92.56,77.15
ID6
  Bottom 0.254: JP27.ID 36.68,102.55
ID7
  Bottom 0.254: JP31.ID 92.56,102.55
N$1  (via drill 0.51)
  Top 0.406: v26.04,25.06 47.02,25.06 51.49,29.53 51.49,29.91 D3.1
  Bottom 0.406: v26.04,25.06 24.46,25.06 23.61,24.21 U2.1
N$2  (via drill 0.51)
  Top 0.406: v26.85,26.34 32.78,26.34 33.4,25.72 42.39,25.72 46.2,29.53 46.2,29.71 D3.2
  Bottom 0.406: U2.20 23.97,26.34 v26.85,26.34
N$3  (via drill 0.51)
  Top 0.406: v34.68,16.12 42.54,16.12 D3.5
  Bottom 0.406: v34.68,16.12 31.24,19.56 31.24,27.11 28.83,29.53 20.56,29.53 17.44,26.41 17.44,25.95 U2.17
N$4  (via drill 0.51)
  Top 0.406: v27.94,27.5 32.61,27.5 35.93,30.81 40.54,30.81 41.34,30.01 D3.3 41.14,30.12
  Bottom 0.406: U2.19 23.33,27.5 v27.94,27.5
N$5  (via drill 0.51)
  Top 0.406: v18.83,22.62 19.9,23.69 22.75,23.69 28.98,29.92 D4.1
  Bottom 0.406: U2.16 18.83,22.76 v18.83,22.62
N$6
  Bottom 0.406: U2.11 MODE.1
N$7  (via drill 0.51)
  Top 0.406: v81.92,25.06 102.89,25.06 107.37,29.53 107.37,29.91 D5.1
  Bottom 0.406: v81.92,25.06 80.34,25.06 79.49,24.21 U3.1
N$8  (via drill 0.51)
  Top 0.406: v30.3,14.97 38.61,14.97 D3.4
  Bottom 0.406: 18.73,26.61 18.73,26.45 U2.18 19.21,26.08 18.64,26.64 20.85,28.85 28.55,28.85 30.3,27.1 v30.3,14.97
N$9
  Bottom 0.406: R5.2 56.87,24.51 57.61,25.25 D2.A
N$10
  Bottom 0.406: R3.1 55.87,28.32 56.25,27.94 D1.A
N$11  (via drill 0.51)
  Top 0.406: D4.2 23.29,27.5 18.02,27.5 v15.18,24.65
  Bottom 0.406: U2.15 15.18,24.62 v15.18,24.65
N$12  (via drill 0.51)
  Top 0.406: D4.3 20.62,29.91 18.92,29.91 13.96,24.94 v13.96,24.24
  Bottom 0.406: U2.14 13.96,24.04 v13.96,24.24
N$13  (via drill 0.51)
  Top 0.406: v14.36,18.55 14.36,18.52 D4.4
  Bottom 0.406: U2.13 14.39,18.55 v14.36,18.55
N$14  (via drill 0.51)
  Top 0.406: v18.02,20.18 18.02,19.94 D4.5
  Bottom 0.406: U2.12 17.81,20.18 v18.02,20.18
N$15  (via drill 0.6)
  Top 0.406: v57.62,29.97 53.85,29.97 53.42,29.54 53.42,28.07 53.1,27.75 51.31,27.75 49.66,26.1 v49.66,24.51
  Bottom 0.406: U1.1 47.59,25.15 48.23,24.51 v49.66,24.51 R5.1 | v57.62,29.97 58.53,29.97 59.36,29.15 D1.C
N$16  (via drill 0.51)
  Top 0.406: v82.73,26.34 88.66,26.34 89.28,25.72 98.27,25.72 102.08,29.53 102.08,29.71 D5.2
  Bottom 0.406: U3.20 79.85,26.34 v82.73,26.34
N$17
  Bottom 0.406: U1.5 50.2,26.51 50.42,26.29 52.49,26.29 R4.2
N$18  (via drill 0.51)
  Top 0.406: v83.82,27.5 88.49,27.5 91.81,30.81 96.42,30.81 97.22,30.01 D5.3 97.02,30.12
  Bottom 0.406: U3.19 79.21,27.5 v83.82,27.5
N$19
  Bottom 0.406: R2.2 R1.1 22.53,11.65 21.68,11.65 17.42,15.9 17.42,16.2 U2.10
N$20
  Bottom 0.406: R1.2 22.8,13.36 22.8,15.2 U2.8 23.01,14.99 24,14.99 24.89,15.88 24.89,16.7 U2.6
N$21  (via drill 0.51)
  Top 0.406: v86.18,14.97 94.49,14.97 D5.4
  Bottom 0.406: 74.61,26.61 74.61,26.45 U3.18 75.09,26.08 74.52,26.64 76.73,28.85 84.43,28.85 86.18,27.1 v86.18,14.97
N$22  (via drill 0.51)
  Top 0.406: D6.2 79.17,27.5 73.9,27.5 v71.06,24.65
  Bottom 0.406: U3.15 71.06,24.62 v71.06,24.65
N$23  (via drill 0.51)
  Top 0.406: D6.3 76.5,29.91 74.8,29.91 69.84,24.94 v69.84,24.24
  Bottom 0.406: U3.14 69.84,24.04 v69.84,24.24
N$24  (via drill 0.51)
  Top 0.406: v70.24,18.55 70.24,18.52 D6.4
  Bottom 0.406: U3.13 70.27,18.55 v70.24,18.55
N$25  (via drill 0.51)
  Top 0.406: v73.9,20.18 73.9,19.94 D6.5
  Bottom 0.406: U3.12 73.69,20.18 v73.9,20.18
N$26
  Bottom 0.406: R7.2 R6.1 78.41,11.65 77.56,11.65 73.3,15.9 73.3,16.2 U3.10
N$27
  Bottom 0.406: R6.2 78.68,13.36 78.68,15.2 U3.8 78.89,14.99 79.88,14.99 80.77,15.88 80.77,16.7 U3.6
N$28  (via drill 0.51)
  Top 0.406: v90.56,16.12 98.42,16.12 D5.5
  Bottom 0.406: v90.56,16.12 87.12,19.56 87.12,27.11 84.71,29.53 76.44,29.53 73.32,26.41 73.32,25.95 U3.17
N$29  (via drill 0.51)
  Top 0.406: v74.71,22.62 75.78,23.69 78.63,23.69 84.86,29.92 D6.1
  Bottom 0.406: U3.16 74.71,22.76 v74.71,22.62
N$30
  Bottom 0.406: U3.11 MODE1.1
N$31
  Bottom 0.406: R8.1 111.75,28.32 112.13,27.94 D7.A
N$32  (via drill 0.6)
  Top 0.406: v113.5,29.97 109.73,29.97 109.3,29.54 109.3,28.07 108.98,27.75 107.19,27.75 105.54,26.1 v105.54,24.51
  Bottom 0.406: U4.1 103.47,25.15 104.11,24.51 v105.54,24.51 R10.1 | v113.5,29.97 114.41,29.97 115.24,29.15 D7.C
N$33
  Bottom 0.406: U4.5 106.08,26.51 106.3,26.29 108.37,26.29 R9.2
N$34
  Bottom 0.406: R10.2 112.75,24.51 113.49,25.25 D8.A
N$35  (via drill 0.51)
  Top 0.406: v26.04,50.46 47.02,50.46 51.49,54.93 51.49,55.31 D9.1
  Bottom 0.406: v26.04,50.46 24.46,50.46 23.61,49.61 U5.1
N$36  (via drill 0.51)
  Top 0.406: v26.85,51.74 32.78,51.74 33.4,51.12 42.39,51.12 46.2,54.93 46.2,55.11 D9.2
  Bottom 0.406: U5.20 23.97,51.74 v26.85,51.74
N$37  (via drill 0.51)
  Top 0.406: v27.94,52.9 32.61,52.9 35.93,56.21 40.54,56.21 41.34,55.41 D9.3 41.14,55.52
  Bottom 0.406: U5.19 23.33,52.9 v27.94,52.9
N$38  (via drill 0.51)
  Top 0.406: v30.3,40.37 38.61,40.37 D9.4
  Bottom 0.406: 18.73,52.01 18.73,51.85 U5.18 19.21,51.48 18.64,52.05 20.85,54.25 28.55,54.25 30.3,52.5 v30.3,40.37
N$39  (via drill 0.51)
  Top 0.406: D10.2 23.29,52.9 18.02,52.9 v15.18,50.05
  Bottom 0.406: U5.15 15.18,50.02 v15.18,50.05
N$40  (via drill 0.51)
  Top 0.406: D10.3 20.62,55.31 18.92,55.31 13.96,50.34 v13.96,49.64
  Bottom 0.406: U5.14 13.96,49.44 v13.96,49.64
N$41  (via drill 0.51)
  Top 0.406: v14.36,43.95 14.36,43.92 D10.4
  Bottom 0.406: U5.13 14.39,43.95 v14.36,43.95
N$42  (via drill 0.51)
  Top 0.406: v18.02,45.58 18.02,45.34 D10.5
  Bottom 0.406: U5.12 17.81,45.58 v18.02,45.58
N$43
  Bottom 0.406: R12.2 R11.1 22.53,37.05 21.68,37.05 17.42,41.3 17.42,41.6 U5.10
N$44
  Bottom 0.406: R11.2 22.8,38.76 22.8,40.6 U5.8 23.01,40.39 24,40.39 24.89,41.27 24.89,42.1 U5.6
N$45  (via drill 0.51)
  Top 0.406: v34.68,41.52 42.54,41.52 D9.5
  Bottom 0.406: v34.68,41.52 31.24,44.96 31.24,52.51 28.83,54.93 20.56,54.93 17.44,51.81 17.44,51.35 U5.17
N$46  (via drill 0.51)
  Top 0.406: v18.83,48.02 19.9,49.09 22.75,49.09 28.98,55.32 D10.1
  Bottom 0.406: U5.16 18.83,48.16 v18.83,48.02
N$47
  Bottom 0.406: U5.11 MODE2.1
N$48
  Bottom 0.406: R13.1 55.87,53.72 56.25,53.34 D11.A
N$49  (via drill 0.6)
  Top 0.406: v57.62,55.37 53.85,55.37 53.42,54.94 53.42,53.47 53.1,53.15 51.31,53.15 49.66,51.5 v49.66,49.91
  Bottom 0.406: U6.1 47.59,50.55 48.23,49.91 v49.66,49.91 R15.1 | v57.62,55.37 58.53,55.37 59.36,54.55 D11.C
N$50
  Bottom 0.406: U6.5 50.2,51.91 50.42,51.69 52.49,51.69 R14.2
N$51
  Bottom 0.406: R15.2 56.87,49.91 57.61,50.65 D12.A
N$52  (via drill 0.51)
  Top 0.406: v81.92,50.46 102.89,50.46 107.37,54.93 107.37,55.31 D13.1
  Bottom 0.406: v81.92,50.46 80.34,50.46 79.49,49.61 U7.1
N$53  (via drill 0.51)
  Top 0.406: v82.73,51.74 88.66,51.74 89.28,51.12 98.27,51.12 102.08,54.93 102.08,55.11 D13.2
  Bottom 0.406: U7.20 79.85,51.74 v82.73,51.74
N$54  (via drill 0.51)
  Top 0.406: v83.82,52.9 88.49,52.9 91.81,56.21 96.42,56.21 97.22,55.41 D13.3 97.02,55.52
  Bottom 0.406: U7.19 79.21,52.9 v83.82,52.9
N$55  (via drill 0.51)
  Top 0.406: v86.18,40.37 94.49,40.37 D13.4
  Bottom 0.406: 74.61,52.01 74.61,51.85 U7.18 75.09,51.48 74.52,52.05 76.73,54.25 84.43,54.25 86.18,52.5 v86.18,40.37
N$56  (via drill 0.51)
  Top 0.406: D14.2 79.17,52.9 73.9,52.9 v71.06,50.05
  Bottom 0.406: U7.15 71.06,50.02 v71.06,50.05
N$57  (via drill 0.51)
  Top 0.406: D14.3 76.5,55.31 74.8,55.31 69.84,50.34 v69.84,49.64
  Bottom 0.406: U7.14 69.84,49.44 v69.84,49.64
N$58  (via drill 0.51)
  Top 0.406: v70.24,43.95 70.24,43.92 D14.4
  Bottom 0.406: U7.13 70.27,43.95 v70.24,43.95
N$59  (via drill 0.51)
  Top 0.406: v73.9,45.58 73.9,45.34 D14.5
  Bottom 0.406: U7.12 73.69,45.58 v73.9,45.58
N$60
  Bottom 0.406: R17.2 R16.1 78.41,37.05 77.56,37.05 73.3,41.3 73.3,41.6 U7.10
N$61
  Bottom 0.406: R16.2 78.68,38.76 78.68,40.6 U7.8 78.89,40.39 79.88,40.39 80.77,41.27 80.77,42.1 U7.6
N$62  (via drill 0.51)
  Top 0.406: v90.56,41.52 98.42,41.52 D13.5
  Bottom 0.406: v90.56,41.52 87.12,44.96 87.12,52.51 84.71,54.93 76.44,54.93 73.32,51.81 73.32,51.35 U7.17
N$63  (via drill 0.51)
  Top 0.406: v74.71,48.02 75.78,49.09 78.63,49.09 84.86,55.32 D14.1
  Bottom 0.406: U7.16 74.71,48.16 v74.71,48.02
N$64
  Bottom 0.406: U7.11 MODE3.1
N$65
  Bottom 0.406: R18.1 111.75,53.72 112.13,53.34 D15.A
N$66  (via drill 0.6)
  Top 0.406: v113.5,55.37 109.73,55.37 109.3,54.94 109.3,53.47 108.98,53.15 107.19,53.15 105.54,51.5 v105.54,49.91
  Bottom 0.406: U8.1 103.47,50.55 104.11,49.91 v105.54,49.91 R20.1 | v113.5,55.37 114.41,55.37 115.24,54.55 D15.C
N$67
  Bottom 0.406: U8.5 106.08,51.91 106.3,51.69 108.37,51.69 R19.2
N$68
  Bottom 0.406: R20.2 112.75,49.91 113.49,50.65 D16.A
N$69  (via drill 0.51)
  Top 0.406: v26.04,75.86 47.02,75.86 51.49,80.33 51.49,80.71 D17.1
  Bottom 0.406: v26.04,75.86 24.46,75.86 23.61,75.01 U9.1
N$70  (via drill 0.51)
  Top 0.406: v26.85,77.14 32.78,77.14 33.4,76.52 42.39,76.52 46.2,80.33 46.2,80.51 D17.2
  Bottom 0.406: U9.20 23.97,77.14 v26.85,77.14
N$71  (via drill 0.51)
  Top 0.406: v27.94,78.3 32.61,78.3 35.93,81.61 40.54,81.61 41.34,80.81 D17.3 41.14,80.92
  Bottom 0.406: U9.19 23.33,78.3 v27.94,78.3
N$72  (via drill 0.51)
  Top 0.406: v30.3,65.77 38.61,65.77 D17.4
  Bottom 0.406: 18.73,77.41 18.73,77.25 U9.18 19.21,76.88 18.64,77.44 20.85,79.65 28.55,79.65 30.3,77.9 v30.3,65.77
N$73  (via drill 0.51)
  Top 0.406: D18.2 23.29,78.3 18.02,78.3 v15.18,75.45
  Bottom 0.406: U9.15 15.18,75.42 v15.18,75.45
N$74  (via drill 0.51)
  Top 0.406: D18.3 20.62,80.71 18.92,80.71 13.96,75.74 v13.96,75.04
  Bottom 0.406: U9.14 13.96,74.84 v13.96,75.04
N$75  (via drill 0.51)
  Top 0.406: v14.36,69.36 14.36,69.32 D18.4
  Bottom 0.406: U9.13 14.39,69.36 v14.36,69.36
N$76  (via drill 0.51)
  Top 0.406: v18.02,70.98 18.02,70.74 D18.5
  Bottom 0.406: U9.12 17.81,70.98 v18.02,70.98
N$77
  Bottom 0.406: R22.2 R21.1 22.53,62.45 21.68,62.45 17.42,66.7 17.42,67 U9.10
N$78
  Bottom 0.406: R21.2 22.8,64.16 22.8,66 U9.8 23.01,65.79 24,65.79 24.89,66.67 24.89,67.5 U9.6
N$79  (via drill 0.51)
  Top 0.406: v34.68,66.92 42.54,66.92 D17.5
  Bottom 0.406: v34.68,66.92 31.24,70.36 31.24,77.92 28.83,80.33 20.56,80.33 17.44,77.21 17.44,76.75 U9.17
N$80  (via drill 0.51)
  Top 0.406: v18.83,73.42 19.9,74.49 22.75,74.49 28.98,80.72 D18.1
  Bottom 0.406: U9.16 18.83,73.56 v18.83,73.42
N$81
  Bottom 0.406: U9.11 MODE4.1
N$82
  Bottom 0.406: R23.1 55.87,79.12 56.25,78.74 D19.A
N$83  (via drill 0.6)
  Top 0.406: v57.62,80.77 53.85,80.77 53.42,80.34 53.42,78.87 53.1,78.55 51.31,78.55 49.66,76.9 v49.66,75.31
  Bottom 0.406: U10.1 47.59,75.95 48.23,75.31 v49.66,75.31 R25.1 | v57.62,80.77 58.53,80.77 59.36,79.95 D19.C
N$84
  Bottom 0.406: U10.5 50.2,77.31 50.42,77.09 52.49,77.09 R24.2
N$85
  Bottom 0.406: R25.2 56.87,75.31 57.61,76.05 D20.A
N$86  (via drill 0.51)
  Top 0.406: v81.92,75.86 102.89,75.86 107.37,80.33 107.37,80.71 D21.1
  Bottom 0.406: v81.92,75.86 80.34,75.86 79.49,75.01 U11.1
N$87  (via drill 0.51)
  Top 0.406: v82.73,77.14 88.66,77.14 89.28,76.52 98.27,76.52 102.08,80.33 102.08,80.51 D21.2
  Bottom 0.406: U11.20 79.85,77.14 v82.73,77.14
N$88  (via drill 0.51)
  Top 0.406: v83.82,78.3 88.49,78.3 91.81,81.61 96.42,81.61 97.22,80.81 D21.3 97.02,80.92
  Bottom 0.406: U11.19 79.21,78.3 v83.82,78.3
N$89  (via drill 0.51)
  Top 0.406: v86.18,65.77 94.49,65.77 D21.4
  Bottom 0.406: 74.61,77.41 74.61,77.25 U11.18 75.09,76.88 74.52,77.44 76.73,79.65 84.43,79.65 86.18,77.9 v86.18,65.77
N$90  (via drill 0.51)
  Top 0.406: D22.2 79.17,78.3 73.9,78.3 v71.06,75.45
  Bottom 0.406: U11.15 71.06,75.42 v71.06,75.45
N$91  (via drill 0.51)
  Top 0.406: D22.3 76.5,80.71 74.8,80.71 69.84,75.74 v69.84,75.04
  Bottom 0.406: U11.14 69.84,74.84 v69.84,75.04
N$92  (via drill 0.51)
  Top 0.406: v70.24,69.36 70.24,69.32 D22.4
  Bottom 0.406: U11.13 70.27,69.36 v70.24,69.36
N$93  (via drill 0.51)
  Top 0.406: v73.9,70.98 73.9,70.74 D22.5
  Bottom 0.406: U11.12 73.69,70.98 v73.9,70.98
N$94
  Bottom 0.406: R27.2 R26.1 78.41,62.45 77.56,62.45 73.3,66.7 73.3,67 U11.10
N$95
  Bottom 0.406: R26.2 78.68,64.16 78.68,66 U11.8 78.89,65.79 79.88,65.79 80.77,66.67 80.77,67.5 U11.6
N$96  (via drill 0.51)
  Top 0.406: v90.56,66.92 98.42,66.92 D21.5
  Bottom 0.406: v90.56,66.92 87.12,70.36 87.12,77.92 84.71,80.33 76.44,80.33 73.32,77.21 73.32,76.75 U11.17
N$97  (via drill 0.51)
  Top 0.406: v74.71,73.42 75.78,74.49 78.63,74.49 84.86,80.72 D22.1
  Bottom 0.406: U11.16 74.71,73.56 v74.71,73.42
N$98
  Bottom 0.406: U11.11 MODE5.1
N$99
  Bottom 0.406: R28.1 111.75,79.12 112.13,78.74 D23.A
N$100  (via drill 0.6)
  Top 0.406: v113.5,80.77 109.73,80.77 109.3,80.34 109.3,78.87 108.98,78.55 107.19,78.55 105.54,76.9 v105.54,75.31
  Bottom 0.406: U12.1 103.47,75.95 104.11,75.31 v105.54,75.31 R30.1 | v113.5,80.77 114.41,80.77 115.24,79.95 D23.C
N$101
  Bottom 0.406: U12.5 106.08,77.31 106.3,77.09 108.37,77.09 R29.2
N$102
  Bottom 0.406: R30.2 112.75,75.31 113.49,76.05 D24.A
N$103  (via drill 0.51)
  Top 0.406: v26.04,101.26 47.02,101.26 51.49,105.73 51.49,106.11 D25.1
  Bottom 0.406: v26.04,101.26 24.46,101.26 23.61,100.41 U13.1
N$104  (via drill 0.51)
  Top 0.406: v26.85,102.54 32.78,102.54 33.4,101.92 42.39,101.92 46.2,105.73 46.2,105.91 D25.2
  Bottom 0.406: U13.20 23.97,102.54 v26.85,102.54
N$105  (via drill 0.51)
  Top 0.406: v27.94,103.69 32.61,103.69 35.93,107.01 40.54,107.01 41.34,106.21 D25.3 41.14,106.32
  Bottom 0.406: U13.19 23.33,103.69 v27.94,103.69
N$106  (via drill 0.51)
  Top 0.406: v30.3,91.17 38.61,91.17 D25.4
  Bottom 0.406: 18.73,102.81 18.73,102.65 U13.18 19.21,102.28 18.64,102.84 20.85,105.05 28.55,105.05 30.3,103.3 v30.3,91.17
N$107  (via drill 0.51)
  Top 0.406: D26.2 23.29,103.69 18.02,103.69 v15.18,100.85
  Bottom 0.406: U13.15 15.18,100.82 v15.18,100.85
N$108  (via drill 0.51)
  Top 0.406: D26.3 20.62,106.11 18.92,106.11 13.96,101.14 v13.96,100.44
  Bottom 0.406: U13.14 13.96,100.24 v13.96,100.44
N$109  (via drill 0.51)
  Top 0.406: v14.36,94.75 14.36,94.72 D26.4
  Bottom 0.406: U13.13 14.39,94.75 v14.36,94.75
N$110  (via drill 0.51)
  Top 0.406: v18.02,96.38 18.02,96.14 D26.5
  Bottom 0.406: U13.12 17.81,96.38 v18.02,96.38
N$111
  Bottom 0.406: R32.2 R31.1 22.53,87.85 21.68,87.85 17.42,92.1 17.42,92.4 U13.10
N$112
  Bottom 0.406: R31.2 22.8,89.56 22.8,91.4 U13.8 23.01,91.19 24,91.19 24.89,92.08 24.89,92.9 U13.6
N$113  (via drill 0.51)
  Top 0.406: v34.68,92.32 42.54,92.32 D25.5
  Bottom 0.406: v34.68,92.32 31.24,95.76 31.24,103.31 28.83,105.73 20.56,105.73 17.44,102.61 17.44,102.15 U13.17
N$114  (via drill 0.51)
  Top 0.406: v18.83,98.82 19.9,99.89 22.75,99.89 28.98,106.12 D26.1
  Bottom 0.406: U13.16 18.83,98.96 v18.83,98.82
N$115
  Bottom 0.406: U13.11 MODE6.1
N$116
  Bottom 0.406: R33.1 55.87,104.52 56.25,104.14 D27.A
N$117  (via drill 0.6)
  Top 0.406: v57.62,106.17 53.85,106.17 53.42,105.74 53.42,104.27 53.1,103.95 51.31,103.95 49.66,102.3 v49.66,100.71
  Bottom 0.406: U14.1 47.59,101.35 48.23,100.71 v49.66,100.71 R35.1 | v57.62,106.17 58.53,106.17 59.36,105.35 D27.C
N$118
  Bottom 0.406: U14.5 50.2,102.71 50.42,102.49 52.49,102.49 R34.2
N$119
  Bottom 0.406: R35.2 56.87,100.71 57.61,101.45 D28.A
N$120  (via drill 0.51)
  Top 0.406: v81.92,101.26 102.89,101.26 107.37,105.73 107.37,106.11 D29.1
  Bottom 0.406: v81.92,101.26 80.34,101.26 79.49,100.41 U15.1
N$121  (via drill 0.51)
  Top 0.406: v82.73,102.54 88.66,102.54 89.28,101.92 98.27,101.92 102.08,105.73 102.08,105.91 D29.2
  Bottom 0.406: U15.20 79.85,102.54 v82.73,102.54
N$122  (via drill 0.51)
  Top 0.406: v83.82,103.69 88.49,103.69 91.81,107.01 96.42,107.01 97.22,106.21 D29.3 97.02,106.32
  Bottom 0.406: U15.19 79.21,103.69 v83.82,103.69
N$123  (via drill 0.51)
  Top 0.406: v86.18,91.17 94.49,91.17 D29.4
  Bottom 0.406: 74.61,102.81 74.61,102.65 U15.18 75.09,102.28 74.52,102.84 76.73,105.05 84.43,105.05 86.18,103.3 v86.18,91.17
N$124  (via drill 0.51)
  Top 0.406: D30.2 79.17,103.69 73.9,103.69 v71.06,100.85
  Bottom 0.406: U15.15 71.06,100.82 v71.06,100.85
N$125  (via drill 0.51)
  Top 0.406: D30.3 76.5,106.11 74.8,106.11 69.84,101.14 v69.84,100.44
  Bottom 0.406: U15.14 69.84,100.24 v69.84,100.44
N$126  (via drill 0.51)
  Top 0.406: v70.24,94.75 70.24,94.72 D30.4
  Bottom 0.406: U15.13 70.27,94.75 v70.24,94.75
N$127  (via drill 0.51)
  Top 0.406: v73.9,96.38 73.9,96.14 D30.5
  Bottom 0.406: U15.12 73.69,96.38 v73.9,96.38
N$128
  Bottom 0.406: R37.2 R36.1 78.41,87.85 77.56,87.85 73.3,92.1 73.3,92.4 U15.10
N$129
  Bottom 0.406: R36.2 78.68,89.56 78.68,91.4 U15.8 78.89,91.19 79.88,91.19 80.77,92.08 80.77,92.9 U15.6
N$130  (via drill 0.51)
  Top 0.406: v90.56,92.32 98.42,92.32 D29.5
  Bottom 0.406: v90.56,92.32 87.12,95.76 87.12,103.31 84.71,105.73 76.44,105.73 73.32,102.61 73.32,102.15 U15.17
N$131  (via drill 0.51)
  Top 0.406: v74.71,98.82 75.78,99.89 78.63,99.89 84.86,106.12 D30.1
  Bottom 0.406: U15.16 74.71,98.96 v74.71,98.82
N$132
  Bottom 0.406: U15.11 MODE7.1
N$133
  Bottom 0.406: R38.1 111.75,104.52 112.13,104.14 D31.A
N$134  (via drill 0.6)
  Top 0.406: v113.5,106.17 109.73,106.17 109.3,105.74 109.3,104.27 108.98,103.95 107.19,103.95 105.54,102.3 v105.54,100.71
  Bottom 0.406: U16.1 103.47,101.35 104.11,100.71 v105.54,100.71 R40.1 | v113.5,106.17 114.41,106.17 115.24,105.35 D31.C
N$135
  Bottom 0.406: U16.5 106.08,102.71 106.3,102.49 108.37,102.49 R39.2
N$136
  Bottom 0.406: R40.2 112.75,100.71 113.49,101.45 D32.A
SHIELD  (via drill 0.51)
  Bottom 0.254: JP4.SHIELD3 36.03,29.84 v36.7,29.84 | v39.37,29.84 39.37,30.04 JP4.SHIELD2
  other vias: 32.77,29.8
  pour Bottom (isolate 0.305): 30.54,30.8 41.34,30.8 41.34,28.26 30.54,28.26
SHIELD1  (via drill 0.51)
  Bottom 0.254: JP7.SHIELD3 91.91,29.84 v92.58,29.84 | v95.25,29.84 95.25,30.04 JP7.SHIELD2
  other vias: 88.65,29.8
  pour Bottom (isolate 0.305): 86.42,30.8 97.22,30.8 97.22,28.26 86.42,28.26
SHIELD2  (via drill 0.51)
  Bottom 0.254: JP11.SHIELD3 36.03,55.24 v36.7,55.24 | v39.37,55.24 39.37,55.44 JP11.SHIELD2
  other vias: 32.77,55.2
  pour Bottom (isolate 0.305): 30.54,56.2 41.34,56.2 41.34,53.66 30.54,53.66
SHIELD3  (via drill 0.51)
  Bottom 0.254: JP15.SHIELD3 91.91,55.24 v92.58,55.24 | v95.25,55.24 95.25,55.44 JP15.SHIELD2
  other vias: 88.65,55.2
  pour Bottom (isolate 0.305): 86.42,56.2 97.22,56.2 97.22,53.66 86.42,53.66
SHIELD4  (via drill 0.51)
  Bottom 0.254: JP19.SHIELD3 36.03,80.64 v36.7,80.64 | v39.37,80.64 39.37,80.83 JP19.SHIELD2
  other vias: 32.77,80.59
  pour Bottom (isolate 0.305): 30.54,81.6 41.34,81.6 41.34,79.06 30.54,79.06
SHIELD5  (via drill 0.51)
  Bottom 0.254: JP23.SHIELD3 91.91,80.64 v92.58,80.64 | v95.25,80.64 95.25,80.83 JP23.SHIELD2
  other vias: 88.65,80.59
  pour Bottom (isolate 0.305): 86.42,81.6 97.22,81.6 97.22,79.06 86.42,79.06
SHIELD6  (via drill 0.51)
  Bottom 0.254: JP27.SHIELD3 36.03,106.05 v36.7,106.05 | v39.37,106.05 39.37,106.24 JP27.SHIELD2
  other vias: 32.77,106
  pour Bottom (isolate 0.305): 30.54,107 41.34,107 41.34,104.46 30.54,104.46
SHIELD7  (via drill 0.51)
  Bottom 0.254: JP31.SHIELD3 91.91,106.05 v92.58,106.05 | v95.25,106.05 95.25,106.24 JP31.SHIELD2
  other vias: 88.65,106
  pour Bottom (isolate 0.305): 86.42,107 97.22,107 97.22,104.46 86.42,104.46
SHLD_PWR  (via drill 0.51)
  Top 0.406: 13.26,21.4 v26.15,21.4 29.15,18.4 | 13.26,21.4 11.66,21.4 11.66,21.31 JP1.2 | 13.26,21.4 v13.26,14.67 | 29.15,18.4 45.34,18.4 D3.6 | 29.15,18.4 29.15,13.89 D4.6
  Bottom 0.406: v26.15,21.4 25.34,22.21 25.34,22.32 U2.3 | v13.26,14.67 14.11,14.67 MODE.2
SHLD_PWR1  (via drill 0.51)
  Top 0.406: 69.14,21.4 v82.03,21.4 85.03,18.4 | 69.14,21.4 67.54,21.4 67.54,21.31 JP6.2 | 69.14,21.4 v69.14,14.67 | 85.03,18.4 101.22,18.4 D5.6 | 85.03,18.4 85.03,13.89 D6.6
  Bottom 0.406: v82.03,21.4 81.22,22.21 81.22,22.32 U3.3 | v69.14,14.67 69.99,14.67 MODE1.2
SHLD_PWR2  (via drill 0.51)
  Top 0.406: 13.26,46.8 v26.15,46.8 29.15,43.8 | 13.26,46.8 11.66,46.8 11.66,46.71 JP10.2 | 13.26,46.8 v13.26,40.07 | 29.15,43.8 45.34,43.8 D9.6 | 29.15,43.8 29.15,39.29 D10.6
  Bottom 0.406: v26.15,46.8 25.34,47.61 25.34,47.72 U5.3 | v13.26,40.07 14.11,40.07 MODE2.2
SHLD_PWR3  (via drill 0.51)
  Top 0.406: 69.14,46.8 v82.03,46.8 85.03,43.8 | 69.14,46.8 67.54,46.8 67.54,46.71 JP14.2 | 69.14,46.8 v69.14,40.07 | 85.03,43.8 101.22,43.8 D13.6 | 85.03,43.8 85.03,39.29 D14.6
  Bottom 0.406: v82.03,46.8 81.22,47.61 81.22,47.72 U7.3 | v69.14,40.07 69.99,40.07 MODE3.2
SHLD_PWR4  (via drill 0.51)
  Top 0.406: 13.26,72.2 v26.15,72.2 29.15,69.2 | 13.26,72.2 11.66,72.2 11.66,72.11 JP18.2 | 13.26,72.2 v13.26,65.47 | 29.15,69.2 45.34,69.2 D17.6 | 29.15,69.2 29.15,64.69 D18.6
  Bottom 0.406: v26.15,72.2 25.34,73.01 25.34,73.12 U9.3 | v13.26,65.47 14.11,65.47 MODE4.2
SHLD_PWR5  (via drill 0.51)
  Top 0.406: 69.14,72.2 v82.03,72.2 85.03,69.2 | 69.14,72.2 67.54,72.2 67.54,72.11 JP22.2 | 69.14,72.2 v69.14,65.47 | 85.03,69.2 101.22,69.2 D21.6 | 85.03,69.2 85.03,64.69 D22.6
  Bottom 0.406: v82.03,72.2 81.22,73.01 81.22,73.12 U11.3 | v69.14,65.47 69.99,65.47 MODE5.2
SHLD_PWR6  (via drill 0.51)
  Top 0.406: 13.26,97.6 v26.15,97.6 29.15,94.6 | 13.26,97.6 11.66,97.6 11.66,97.51 JP26.2 | 13.26,97.6 v13.26,90.87 | 29.15,94.6 45.34,94.6 D25.6 | 29.15,94.6 29.15,90.09 D26.6
  Bottom 0.406: v26.15,97.6 25.34,98.41 25.34,98.52 U13.3 | v13.26,90.87 14.11,90.87 MODE6.2
SHLD_PWR7  (via drill 0.51)
  Top 0.406: 69.14,97.6 v82.03,97.6 85.03,94.6 | 69.14,97.6 67.54,97.6 67.54,97.51 JP30.2 | 69.14,97.6 v69.14,90.87 | 85.03,94.6 101.22,94.6 D29.6 | 85.03,94.6 85.03,90.09 D30.6
  Bottom 0.406: v82.03,97.6 81.22,98.41 81.22,98.52 U15.3 | v69.14,90.87 69.99,90.87 MODE7.2
SIG  (via drill 0.51)
  Top 0.406: v20.46,22.62 48.44,22.62 52.51,18.54 JP2.3
  Bottom 0.406: U2.5 20.77,22.62 v20.46,22.62
SIG1  (via drill 0.51)
  Top 0.406: v76.34,22.62 104.32,22.62 108.39,18.54 JP5.3
  Bottom 0.406: U3.5 76.65,22.62 v76.34,22.62
SIG2  (via drill 0.51)
  Top 0.406: v20.46,48.02 48.44,48.02 52.51,43.94 JP9.3
  Bottom 0.406: U5.5 20.77,48.02 v20.46,48.02
SIG3  (via drill 0.51)
  Top 0.406: v76.34,48.02 104.32,48.02 108.39,43.94 JP13.3
  Bottom 0.406: U7.5 76.65,48.02 v76.34,48.02
SIG4  (via drill 0.51)
  Top 0.406: v20.46,73.42 48.44,73.42 52.51,69.34 JP17.3
  Bottom 0.406: U9.5 20.77,73.42 v20.46,73.42
SIG5  (via drill 0.51)
  Top 0.406: v76.34,73.42 104.32,73.42 108.39,69.34 JP21.3
  Bottom 0.406: U11.5 76.65,73.42 v76.34,73.42
SIG6  (via drill 0.51)
  Top 0.406: v20.46,98.82 48.44,98.82 52.51,94.74 JP25.3
  Bottom 0.406: U13.5 20.77,98.82 v20.46,98.82
SIG7  (via drill 0.51)
  Top 0.406: v76.34,98.82 104.32,98.82 108.39,94.74 JP29.3
  Bottom 0.406: U15.5 76.65,98.82 v76.34,98.82
VBUS
  Bottom 0.406: 52.62,30.16 R3.2 | 52.62,30.16 C1.1 | JP4.VBUS 34.73,24.96 35.18,24.51 41.91,24.51 42.29,24.89 42.29,29.46 42.99,30.16 47.56,30.16 | 47.56,30.16 48.86,30.16 | 52.62,30.16 50.23,30.16 | 50.23,30.16 47.56,30.16 | U1.4 50.2,30.13 50.23,30.16
VBUS1
  Bottom 0.406: 108.5,30.16 R8.2 | 108.5,30.16 C3.1 | JP7.VBUS 90.61,24.96 91.06,24.51 97.79,24.51 98.17,24.89 98.17,29.46 98.87,30.16 103.44,30.16 | 103.44,30.16 104.74,30.16 | 108.5,30.16 106.11,30.16 | 106.11,30.16 103.44,30.16 | U4.4 106.08,30.13 106.11,30.16
VBUS2
  Bottom 0.406: 52.62,55.56 R13.2 | 52.62,55.56 C5.1 | JP11.VBUS 34.73,50.36 35.18,49.91 41.91,49.91 42.29,50.29 42.29,54.86 42.99,55.56 47.56,55.56 | 47.56,55.56 48.86,55.56 | 52.62,55.56 50.23,55.56 | 50.23,55.56 47.56,55.56 | U6.4 50.2,55.53 50.23,55.56
VBUS3
  Bottom 0.406: 108.5,55.56 R18.2 | 108.5,55.56 C7.1 | JP15.VBUS 90.61,50.36 91.06,49.91 97.79,49.91 98.17,50.29 98.17,54.86 98.87,55.56 103.44,55.56 | 103.44,55.56 104.74,55.56 | 108.5,55.56 106.11,55.56 | 106.11,55.56 103.44,55.56 | U8.4 106.08,55.53 106.11,55.56
VBUS4
  Bottom 0.406: 52.62,80.96 R23.2 | 52.62,80.96 C9.1 | JP19.VBUS 34.73,75.76 35.18,75.31 41.91,75.31 42.29,75.69 42.29,80.26 42.99,80.96 47.56,80.96 | 47.56,80.96 48.86,80.96 | 52.62,80.96 50.23,80.96 | 50.23,80.96 47.56,80.96 | U10.4 50.2,80.93 50.23,80.96
VBUS5
  Bottom 0.406: 108.5,80.96 R28.2 | 108.5,80.96 C11.1 | JP23.VBUS 90.61,75.76 91.06,75.31 97.79,75.31 98.17,75.69 98.17,80.26 98.87,80.96 103.44,80.96 | 103.44,80.96 104.74,80.96 | 108.5,80.96 106.11,80.96 | 106.11,80.96 103.44,80.96 | U12.4 106.08,80.93 106.11,80.96
VBUS6
  Bottom 0.406: 52.62,106.36 R33.2 | 52.62,106.36 C13.1 | JP27.VBUS 34.73,101.16 35.18,100.71 41.91,100.71 42.29,101.09 42.29,105.66 42.99,106.36 47.56,106.36 | 47.56,106.36 48.86,106.36 | 52.62,106.36 50.23,106.36 | 50.23,106.36 47.56,106.36 | U14.4 50.2,106.33 50.23,106.36
VBUS7
  Bottom 0.406: 108.5,106.36 R38.2 | 108.5,106.36 C15.1 | JP31.VBUS 90.61,101.16 91.06,100.71 97.79,100.71 98.17,101.09 98.17,105.66 98.87,106.36 103.44,106.36 | 103.44,106.36 104.74,106.36 | 108.5,106.36 106.11,106.36 | 106.11,106.36 103.44,106.36 | U16.4 106.08,106.33 106.11,106.36